# Altium PCB PCB.PcbDoc (part 2 of 2)
Units mil, origin at the board's own origin, x right, y up, seen from the top; angles counter-clockwise.
Board outline 2112 x 1014.5 mil, 4 copper layers (Top Layer, Layer 1, Layer 2, Bottom Layer), stack 36.268 mil thick; 45 components, 36 nets, 214 pads, 253 vias.
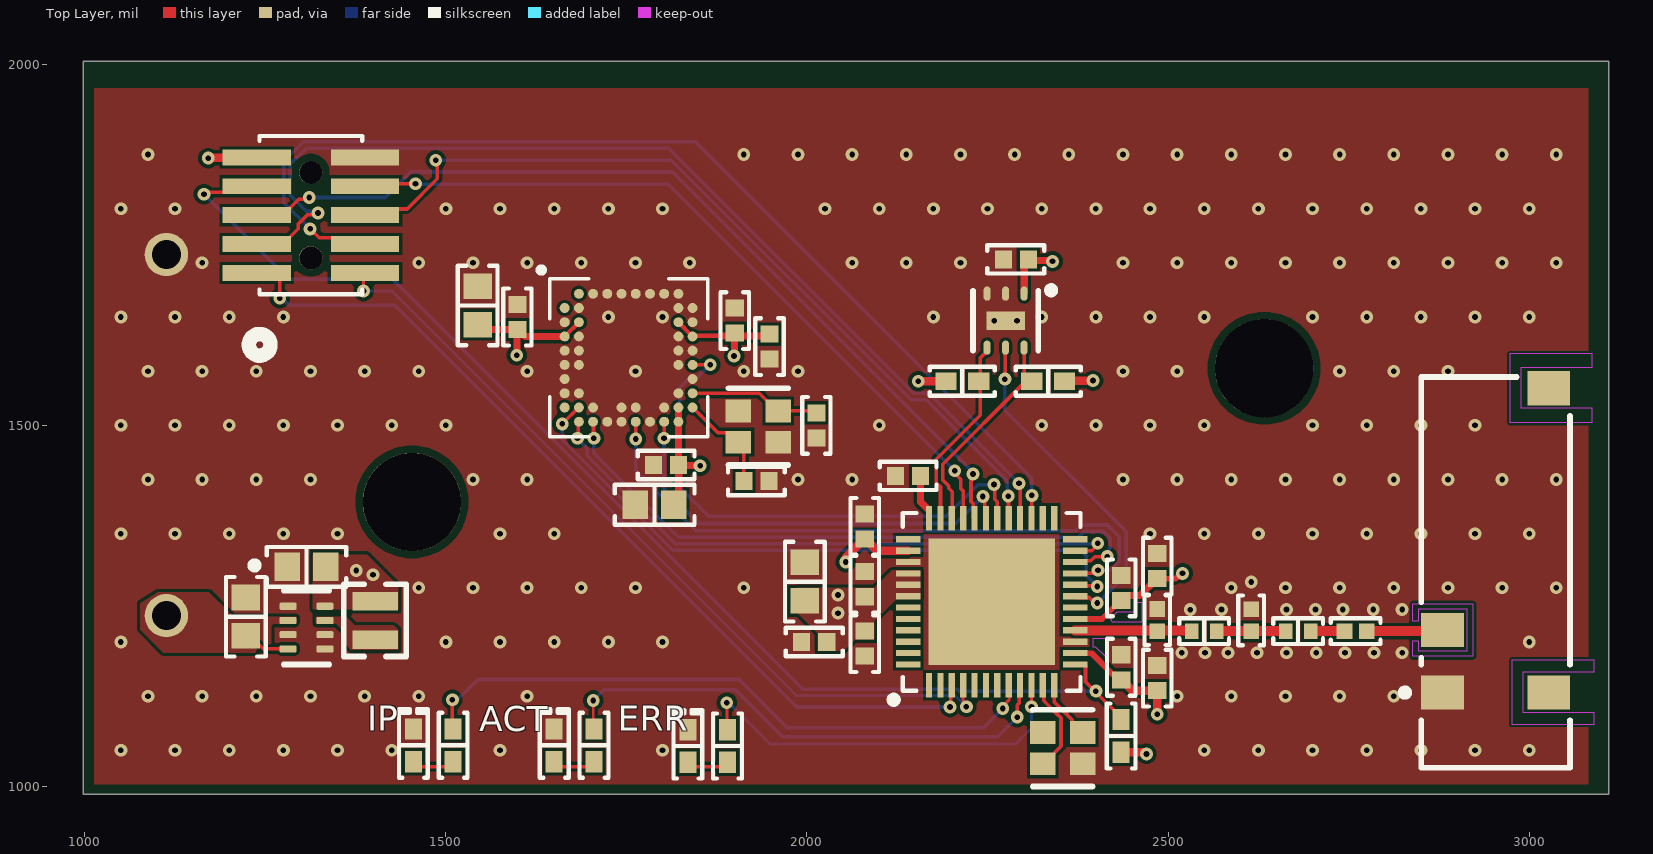
[diagram p0: Top Layer view]

## Other copper (continued)
Top Layer: (continued)
  pour cut-out: 2499.45,1235.06 2502.14,1233.27 2517.02,1233.27 2519.4,1234.86 2523.23,1235.62 2542.13,1235.62 2545.95,1234.86 2549.19,1232.7 2551.36,1229.45 2552.12,1225.63 2552.12,1204.37 2551.36,1200.55 2549.19,1197.3 2545.95,1195.14 2542.13,1194.38 2523.23,1194.38 2519.4,1195.14 2516.16,1197.3 2514.97,1199.1 2504.02,1199.1 2502.7,1197.11 2499.45,1194.94 2495.63,1194.18 2474.37,1194.18 2470.55,1194.94 2467.3,1197.11 2465.98,1199.1 2371.18,1199.1 2370.22,1199.29 2369.23,1199.29 2366.52,1199.83 2364.3,1200.75 2362.92,1201.32 2362.91,1201.32 2362.11,1201.86 2354.25,1201.86 2350.43,1202.62 2347.19,1204.79 2345.02,1208.03 2344.26,1211.85 2344.26,1220.51 2345.02,1224.34 2347.19,1227.58 2350.43,1229.74 2354.25,1230.5 2362.11,1230.5 2362.91,1231.04 2362.92,1231.04 2364.63,1231.75 2366.52,1232.53 2369.23,1233.07 2370.22,1233.07 2371.18,1233.27 2467.86,1233.27 2470.55,1235.06 2474.37,1235.82 2495.63,1235.82
  pour cut-out: 2913.35,1249.47 2916.59,1247.3 2918.76,1244.06 2919.52,1240.24 2919.52,1192.99 2918.76,1189.17 2916.59,1185.93 2913.35,1183.76 2909.53,1183 2850.47,1183 2846.65,1183.76 2843.41,1185.93 2841.24,1189.17 2840.48,1192.99 2840.48,1197.91 2793.3,1197.91 2792.89,1197.3 2789.65,1195.14 2785.83,1194.38 2764.17,1194.38 2760.35,1195.14 2757.11,1197.3 2754.94,1200.55 2754.18,1204.37 2754.18,1225.63 2754.94,1229.45 2757.11,1232.7 2760.35,1234.86 2764.17,1235.62 2785.83,1235.62 2789.65,1234.86 2792.89,1232.7 2793.3,1232.09 2840.48,1232.09 2840.48,1240.24 2841.24,1244.06 2843.41,1247.3 2846.65,1249.47 2850.47,1250.23 2909.53,1250.23
  pour cut-out: 2758.94,1234.86 2762.18,1232.7 2764.35,1229.45 2765.11,1225.63 2765.11,1204.37 2764.35,1200.55 2762.18,1197.3 2758.94,1195.14 2755.12,1194.38 2733.46,1194.38 2729.64,1195.14 2726.4,1197.3 2725.99,1197.91 2714.24,1197.91 2713.84,1197.3 2710.6,1195.14 2706.77,1194.38 2687.87,1194.38 2684.05,1195.14 2680.81,1197.3 2678.64,1200.55 2677.88,1204.37 2677.88,1225.63 2678.64,1229.45 2680.81,1232.7 2684.05,1234.86 2687.87,1235.62 2706.77,1235.62 2710.6,1234.86 2713.84,1232.7 2714.24,1232.09 2725.99,1232.09 2726.4,1232.7 2729.64,1234.86 2733.46,1235.62 2755.12,1235.62
  pour cut-out: 2675.95,1234.86 2679.19,1232.7 2681.36,1229.45 2682.12,1225.63 2682.12,1204.37 2681.36,1200.55 2679.19,1197.3 2675.95,1195.14 2672.13,1194.38 2653.23,1194.38 2649.4,1195.14 2646.16,1197.3 2645.76,1197.91 2633.47,1197.91 2632.7,1196.75 2629.45,1194.59 2625.63,1193.83 2604.37,1193.83 2600.55,1194.59 2597.3,1196.75 2596.53,1197.91 2584.24,1197.91 2583.84,1197.3 2580.6,1195.14 2576.77,1194.38 2557.87,1194.38 2554.05,1195.14 2550.81,1197.3 2548.64,1200.55 2547.88,1204.37 2547.88,1225.63 2548.64,1229.45 2550.81,1232.7 2554.05,1234.86 2557.87,1235.62 2576.77,1235.62 2580.6,1234.86 2583.84,1232.7 2584.24,1232.09 2597,1232.09 2597.3,1232.54 2600.55,1234.7 2604.37,1235.46 2625.63,1235.46 2629.45,1234.7 2632.7,1232.54 2633,1232.09 2645.76,1232.09 2646.16,1232.7 2649.4,1234.86 2653.23,1235.62 2672.13,1235.62

## Silkscreen, mask and mechanical layers (free items; w line width, h text height)
Top Overlay:
  text "IP" at 1391,1065.17 h60
  text "ERR" at 1738,1065.17 h60
  text "ACT" at 1546,1064.39 h60
Top Solder:
  text "IPR v1" at 2725,1895.28 h100